# Altium PCB T1_MODIFYV1_0527.PCBDOC (part 3 of 6)
Units mm, origin at the board's own origin, x right, y up, seen from the top; angles counter-clockwise.
Board outline 1320.8 x 844.04 mm, 2 copper layers (Top Layer, Bottom Layer); 219 components, 215 nets, 1393 pads, 492 vias.
Unrouted connection lines stored in the file: 60.
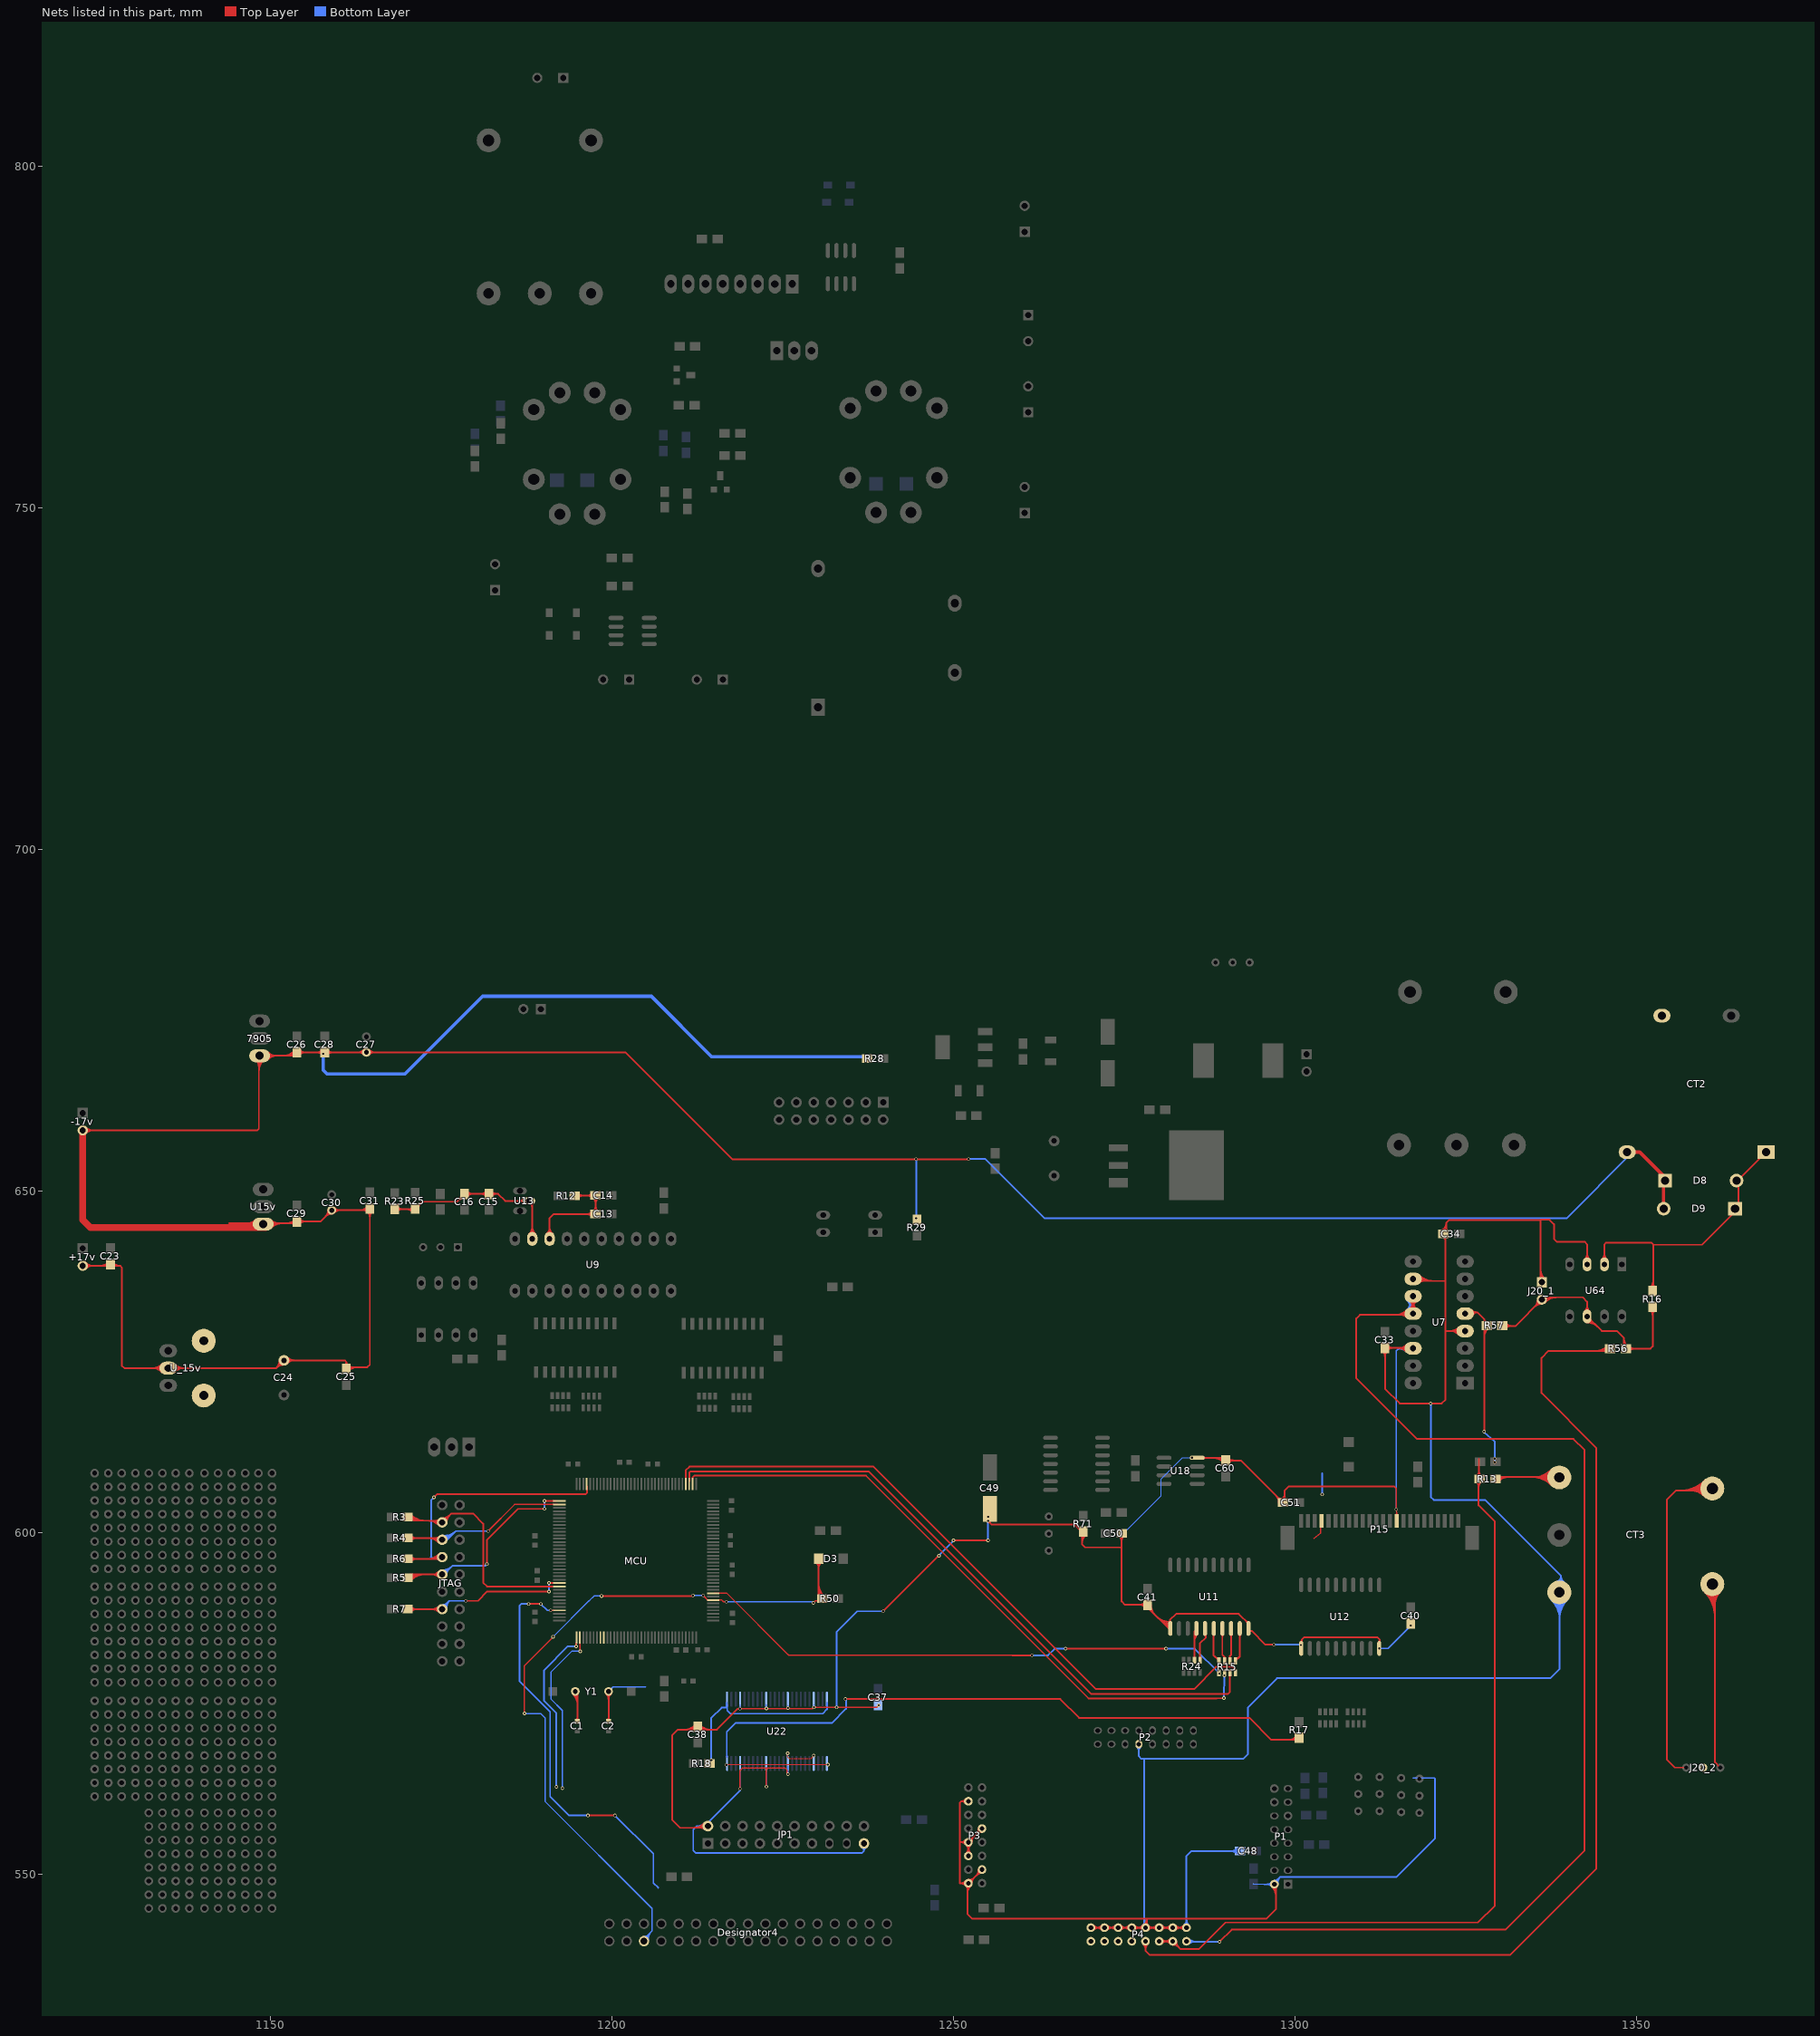
[diagram p3: the nets of this part, all layers, seen from the top]

## Via types
v1: diameter 0.5, hole 0.3, Top Layer to Bottom Layer, 470 vias
v2: diameter 0.8, hole 0.5, Top Layer to Bottom Layer, 12 vias
v3: diameter 3, hole 1.5, Top Layer to Bottom Layer, 4 vias
v4: diameter 3, hole 3, Top Layer to Bottom Layer, 4 vias
v5: diameter 1, hole 0.7, Top Layer to Bottom Layer, 2 vias

## Nets (pads, with @x,y where several pads share a name; then routed paths per layer and width w, separated by ;. In a path a pad name is that pad's centre, name@x,y a point inside that pad or via, vN(x,y) a via of type N, cw(c..) or ccw(c..) an arc to the next point about the centre after c; other vN are vias at no path point) (continued)
GND_D1: 7905.1 +17v.2 -17v.2 C23.2 C24.2 C25.2 C26.1 C27.1 C28.1 C29.2 C30.1 C31.2 C33.1 C34.1 C37.1 C38.2 C40.1 C41.1 C48.1 C49.1 C50.1 C51.2 C60.1 CT2.2 CT3.1 D8.2 D9.1 J20_1.1 JP1.2 JP1.19 P1.2 P2.26 P3.35 P3.40 P3.41 P3.43 P3.46 P3.47 P4.50 P4.52 P4.54 P4.56 P4.58 P4.60 P4.62 P4.64 P15.15 R28.2 R29.1 R71.2 U7.4 U7.10 U7.14 U11.1 U11.10 U12.1 U12.10 U15v.1 U18.4 U22.4 U22.10 U22.15 U22.21 U22.28 U22.34 U22.39 U22.45 U64.3 U_15v.2 | length 1491.3
  Top Layer w0.15: v1(1225.677,567.741) 1225.677,567.233 1225.931,566.979 1229.081,566.979 v1(1229.512,567.411) ; P15.15@1314.706,602.619 ccw(c1314.403,602.922) 1314.831,602.922 ; v1@1314.745,603.418 cw(c1314.537,603.21) v1@1314.831,603.21 ; v1(1314.78,603.453) 1314.831,603.402 P15.15@1314.831,602.463 ; 1314.831,603.085 ccw(c1315.49,603.085) P15.15@1315.024,602.619
  Top Layer w0.2: v1(1218.692,562.534) 1218.692,565.201 1219.06,565.569 ; v1(1218.692,574.269) 1229.335,574.269 v1(1229.538,574.472) 1238.707,574.472 v1(1239.012,574.777) ; 1219.048,565.582 1225.296,565.582 1225.601,565.277 1225.601,564.672 v1@1225.652,564.621 ; v1(1222.553,562.889) 1222.553,565.531 1222.527,565.556 1222.807,565.556
  Top Layer w0.254: +17v.2@1122.477,639.115 C23.2@1126.287,639.115 ; -17v.2@1122.477,658.927 1148.004,658.927 1148.258,659.181 1148.258,669.849 1153.338,669.849 C26.1@1153.846,670.357 1201.928,670.357 1217.574,654.71 v1@1252.169,654.71 ; +17v.2@1122.738,638.854 cw(c1123.368,638.224) 1123.368,639.115 cw(c1123.368,640.006) +17v.2@1122.738,639.376 ; -17v.2@1122.738,658.666 cw(c1123.368,658.036) 1123.368,658.927 cw(c1123.368,659.818) -17v.2@1122.738,659.188 ; +17v.2@1122.917,638.674 cw(c1123.981,637.611) 1123.981,639.115 cw(c1123.981,640.619) +17v.2@1122.917,639.555 ; -17v.2@1122.917,658.486 cw(c1123.981,657.423) 1123.981,658.927 cw(c1123.981,660.431) -17v.2@1122.917,659.367 ; 1125.008,639.115 ccw(c1125.008,640.775) C23.2@1126.182,639.601 ; C23.2@1126.182,638.883 ccw(c1125.621,638.322) 1125.621,639.115 ccw(c1125.621,640.162) C23.2@1126.361,639.421 ; C23.2@1126.541,639.369 1126.795,639.115 1127.938,639.115 ; C23.2@1126.732,639.409 ccw(c1127.379,639.973) 1127.379,639.115 ; C23.2@1126.9,638.883 cw(c1127.461,638.322) 1127.461,639.115 ; C23.2@1126.924,639.576 ccw(c1127.938,640.461) 1127.938,639.115 ; U_15v.2@1134.059,623.545 ccw(c1132.649,622.136) 1132.649,624.129 ccw(c1132.649,626.122) U_15v.2@1134.059,624.713 ; U_15v.2@1134.238,623.725 ccw(c1133.263,622.749) 1133.263,624.129 ccw(c1133.263,625.509) U_15v.2@1134.238,624.533 ; U_15v.2@1135.741,623.725 cw(c1136.717,622.749) 1136.717,624.129 cw(c1136.717,625.509) U_15v.2@1135.741,624.533 ; U_15v.2@1135.921,623.545 cw(c1137.33,622.136) 1137.33,624.129 cw(c1137.33,626.122) U_15v.2@1135.921,624.713 ; 1140.19,644.636 1140.257,644.703 ; 1143.94,645.338 1153.592,645.338 C29.2@1153.846,645.592 1157.275,645.592 C30.1@1158.926,647.243 1164.26,647.243 C31.2@1164.514,647.497 1164.514,624.637 1164.133,624.256 1161.339,624.256 C25.2@1161.085,624.002 1161.085,625.018 ; 1146.022,645.338 cw(c1146.022,642.911) U15v.1@1147.738,644.627 ; U15v.1@1147.738,645.795 cw(c1146.635,646.897) 1146.635,645.338 cw(c1146.635,643.524) U15v.1@1147.917,644.807 ; 7905.1@1147.801,669.265 cw(c1146.698,668.162) 1148.258,668.162 cw(c1150.071,668.162) 7905.1@1148.789,669.445 ; U15v.1@1147.917,645.615 cw(c1147.248,646.284) 1147.248,645.338 cw(c1147.248,644.138) U15v.1@1148.097,644.986 ; 7905.1@1147.981,669.445 cw(c1147.312,668.776) 1148.258,668.776 cw(c1149.458,668.776) 7905.1@1148.609,669.624 ; 1148.258,667.549 cw(c1150.684,667.549) 7905.1@1148.969,669.265 ; 7905.1@1149.36,669.445 cw(c1150.336,668.469) 1150.336,669.849 cw(c1150.336,671.229) 7905.1@1149.36,670.253 ; 7905.1@1149.54,669.265 cw(c1150.949,667.856) 1150.949,669.849 cw(c1150.949,671.842) 7905.1@1149.54,670.433 ; U15v.1@1149.689,644.986 cw(c1150.537,644.138) 1150.537,645.338 cw(c1150.537,646.284) U15v.1@1149.868,645.615 ; U15v.1@1149.868,644.807 cw(c1151.151,643.524) 1151.151,645.338 cw(c1151.151,646.897) U15v.1@1150.048,645.795 ; U15v.1@1150.048,644.627 cw(c1151.764,642.911) 1151.764,645.338 ; C24.2@1151.28,625.272 cw(c1149.686,625.272) 1150.813,624.144 cw(c1151.941,623.017) C24.2@1151.941,624.611 ; C24.2@1151.534,625.272 cw(c1150.553,625.272) 1151.247,624.578 cw(c1151.941,623.884) C24.2@1151.941,624.865 ; 1151.7,669.849 ccw(c1151.7,672.376) C26.1@1153.487,670.589 ; C24.2@1152.228,624.984 cw(c1152.922,624.291) 1152.922,625.272 cw(c1152.922,626.253) C24.2@1152.228,625.559 ; 1152.313,645.338 ccw(c1152.313,646.998) C29.2@1153.487,645.824 ; 1152.313,669.849 ccw(c1152.313,671.763) C26.1@1153.666,670.409 ; C24.2@1152.408,624.805 cw(c1153.535,623.677) 1153.535,625.272 cw(c1153.535,626.866) C24.2@1152.408,625.739 ; 1152.926,669.849 ccw(c1152.926,671.15) C26.1@1153.846,670.23 ; C29.2@1153.487,645.106 ccw(c1152.926,644.545) 1152.926,645.338 ccw(c1152.926,646.385) C29.2@1153.666,645.644 ; C29.2@1154.205,645.233 cw(c1155.072,644.365) 1155.072,645.592 cw(c1155.072,646.818) C29.2@1154.205,645.951 ; C26.1@1154.205,669.998 cw(c1155.072,669.13) 1155.072,670.357 cw(c1155.072,671.583) C26.1@1154.205,670.716 ; 1157.195,670.357 cw(c1157.195,669.668) C28.1@1157.683,670.155 ; C28.1@1157.551,669.998 ccw(c1156.683,669.13) 1156.683,670.357 ccw(c1156.683,671.583) C28.1@1157.551,670.716 ; C28.1@1157.68,670.155 cw(c1158.167,669.668) C28.1@1158.167,670.357 ; C28.1@1158.269,669.998 cw(c1159.136,669.13) 1159.136,670.357 cw(c1159.136,671.583) C28.1@1158.269,670.716 ; C30.1@1158.403,647.243 cw(c1157.14,647.243) 1158.033,646.35 cw(c1158.926,645.457) C30.1@1158.926,646.72 ; C30.1@1159.296,646.873 cw(c1160.188,645.98) 1160.188,647.243 cw(c1160.188,648.505) C30.1@1159.296,647.613 ; C25.2@1160.827,624.566 ccw(c1160.561,625.018) 1161.085,625.018 ; C25.2@1161.264,623.949 cw(c1162.005,623.209) 1162.005,624.256 cw(c1162.005,625.049) C25.2@1161.444,624.488 ; C25.2@1161.343,624.566 cw(c1161.609,625.018) 1161.085,625.018 ; C25.2@1161.444,623.77 cw(c1162.618,622.596) 1162.618,624.256 ; 1162.981,647.243 ccw(c1162.981,648.903) C31.2@1164.155,647.729 ; C27.1@1163.636,669.987 ccw(c1162.743,669.094) 1162.743,670.357 ccw(c1162.743,671.619) C27.1@1163.636,670.727 ; C31.2@1164.334,647.549 cw(c1163.594,648.29) 1163.594,647.243 cw(c1163.594,646.45) 1164.155,647.011 cw(c1163.287,646.143) 1164.514,646.143 cw(c1165.74,646.143) C31.2@1164.873,647.011 ; C27.1@1164.376,669.987 cw(c1165.268,669.094) 1165.268,670.357 cw(c1165.268,671.619) C27.1@1164.376,670.727 ; 1210.532,571.221 ccw(c1210.532,573.488) C38.2@1212.135,571.885 ; 1211.145,571.221 ccw(c1211.145,572.874) C38.2@1212.315,571.705 ; 1211.759,571.221 ccw(c1211.759,572.261) 1212.494,571.525 ccw(c1213.23,572.261) 1213.23,571.221 ; 1211.805,556.844 ccw(c1211.805,559.285) JP1.2@1213.531,557.559 ; 1212.418,556.844 ccw(c1212.418,558.671) JP1.2@1213.71,557.379 ; C38.2@1212.674,571.705 ccw(c1213.843,572.874) 1213.843,571.221 ; C38.2@1212.854,571.885 ccw(c1214.457,573.488) 1214.457,571.221 ; 1213.002,556.844 cw(c1213.002,556.096) JP1.2@1213.531,556.625 ; 1213.032,556.844 ccw(c1213.032,558.058) JP1.2@1213.89,557.2 ; JP1.2@1213.998,556.844 1209.929,556.844 1208.761,558.013 1208.761,570.382 1209.599,571.221 1215.339,571.221 1218.387,574.269 v1(1218.692,574.269) ; v1(1239.647,588.543) 1239.68,588.627 v1(1247.828,596.675) ; v1(1249.959,598.907) v1(1255.014,598.907) ; 1250.861,554.729 P3.41@1252.134,554.729 ; P3.35@1251.734,560.417 ccw(c1251.095,559.919) 1251.095,560.729 ; P3.35@1251.734,561.041 cw(c1251.095,561.538) 1251.095,560.729 ; P3.47@1251.775,549.088 cw(c1250.908,549.955) 1250.908,548.729 ; P3.43@1251.775,553.088 ccw(c1250.908,553.955) 1252.134,553.955 ccw(c1253.361,553.955) P3.43@1252.494,553.088 ; P3.41@1251.775,555.088 cw(c1250.908,555.955) 1250.908,554.729 cw(c1250.908,553.502) 1251.775,554.37 cw(c1250.908,553.502) 1252.134,553.502 cw(c1253.361,553.502) P3.41@1252.494,554.37 ; 1251.991,547.157 cw(c1253.706,547.157) P3.47@1252.494,548.37 ; 1251.991,547.77 cw(c1253.093,547.77) P3.47@1252.314,548.549 ; 1251.991,547.848 ccw(c1251.253,547.848) 1251.775,548.37 ccw(c1250.908,547.502) 1250.908,548.729 ; P3.47@1251.991,548.729 1251.991,544.22 1252.677,543.535 1295.761,543.535 1297.178,544.952 P1.2@1297.178,548.615 ; P3.47@1252.134,548.983 ccw(c1252.134,549.696) 1252.639,549.192 ; P3.47@1252.134,549.237 ccw(c1252.134,550.563) 1253.072,549.625 ; P3.43@1252.134,552.729 P3.41@1252.134,554.729 ; P3.41@1252.134,555.237 ccw(c1252.134,556.463) 1253.002,555.596 ccw(c1253.869,554.729) P3.41@1252.642,554.729 ; P3.35@1252.134,560.729 1251.095,560.729 ; P3.47@1252.642,548.729 cw(c1253.769,548.729) 1252.972,549.525 ; 1253.238,549.791 ccw(c1252.3,550.729) P3.46@1253.626,550.729 ; 1253.338,549.891 cw(c1254.134,549.094) P3.46@1254.134,550.221 ; P3.40@1253.626,556.729 cw(c1252.4,556.729) 1253.267,555.862 cw(c1254.134,554.994) P3.40@1254.134,556.221 ; 1253.672,550.225 ccw(c1253.167,550.729) P3.46@1253.88,550.729 ; P3.40@1253.973,556.729 P3.40@1254.134,556.729 P3.41@1252.134,554.729 ; P3.46@1254.344,550.897 1252.176,548.729 1250.908,548.729 ; C49.1@1255.015,601.775 ccw(c1254.528,602.263) C49.1@1255.217,602.263 ; C49.1@1255.015,601.779 cw(c1254.909,601.489) 1255.217,601.489 ; C49.1@1255.015,602.36 ccw(c1254.528,602.847) C49.1@1255.217,602.847 ; C49.1@1255.015,602.362 cw(c1254.528,601.875) C49.1@1255.217,601.875 ; C49.1@1255.073,601.752 cw(c1255.033,601.572) 1255.217,601.572 cw(c1255.382,601.572) C49.1@1255.364,601.736 ; C49.1@1255.217,603.225 1255.217,601.574 1255.573,601.218 1267.714,601.218 R71.2@1268.933,599.999 ; 1267.905,601.027 ccw(c1268.539,601.662) R71.2@1268.823,600.811 ; 1268.195,600.737 ccw(c1268.684,601.226) R71.2@1268.904,600.57 ; R71.2@1268.386,600.546 cw(c1268.169,600.329) R71.2@1268.476,600.329 ; R71.2@1268.625,599.716 cw(c1268.312,599.403) 1268.754,599.403 ; 1268.754,598.332 cw(c1270.675,598.332) R71.2@1269.338,599.71 ; 1268.754,598.932 cw(c1270.093,598.932) R71.2@1269.161,599.893 ; R71.2@1268.754,600.178 1268.754,598.347 1269.213,597.888 1274.397,597.888 1274.572,597.713 ; P4.50@1270.067,542.229 P4.64@1284.067,542.229 ; P4.50@1270.426,541.87 cw(c1271.293,541.003) 1271.293,542.229 cw(c1271.293,543.455) P4.50@1270.426,542.588 ; P4.52@1271.707,541.87 ccw(c1270.84,541.003) 1270.84,542.229 ccw(c1270.84,543.455) P4.52@1271.707,542.588 ; P4.52@1272.426,541.87 cw(c1273.293,541.003) 1273.293,542.229 cw(c1273.293,543.455) P4.52@1272.426,542.588 ; P4.54@1273.707,541.87 ccw(c1272.84,541.003) 1272.84,542.229 ccw(c1272.84,543.455) P4.54@1273.707,542.588 ; C50.1@1274.213,599.589 cw(c1273.346,598.722) 1274.572,598.722 cw(c1275.798,598.722) C50.1@1274.931,599.589 ; P4.54@1274.426,541.87 cw(c1275.293,541.003) 1275.293,542.229 cw(c1275.293,543.455) P4.54@1274.426,542.588 ; C50.1@1274.572,599.948 1274.572,589.966 1275.055,589.483 C41.1@1278.382,589.483 ; P4.56@1275.707,541.87 ccw(c1274.84,541.003) 1274.84,542.229 ccw(c1274.84,543.455) P4.56@1275.707,542.588 ; P4.56@1276.426,541.87 cw(c1277.293,541.003) 1277.293,542.229 cw(c1277.293,543.455) P4.56@1276.426,542.588 ; P4.58@1277.707,541.87 ccw(c1276.84,541.003) 1276.84,542.229 ccw(c1276.84,543.455) P4.58@1277.707,542.588 ; P4.58@1277.791,542.656 ccw(c1277.238,543.509) 1278.255,543.509 P4.58@1278.255,542.229 ; P4.58@1277.929,542.442 ccw(c1277.54,543.042) 1278.255,543.042 ; C41.1@1278.023,589.124 ccw(c1277.156,588.257) 1277.156,589.483 ccw(c1277.156,590.71) C41.1@1278.023,589.842 ; 1278.255,543.001 ccw(c1278.838,543.001) 1278.426,542.588 ccw(c1279.293,543.455) 1279.293,542.229 ccw(c1279.293,541.003) P4.58@1278.426,541.87 ; C41.1@1278.382,588.848 cw(c1278.382,588.235) 1278.816,588.669 ; C41.1@1278.636,589.356 ccw(c1279.862,589.356) 1278.995,588.489 ; C41.1@1278.661,589.636 1278.661,588.823 U11.1@1281.457,586.027 ; C41.1@1278.89,589.356 ccw(c1280.73,589.356) 1279.429,588.055 ; 1279.661,587.824 ccw(c1281.709,589.873) U11.1@1281.709,586.975 ; P4.60@1279.707,541.87 ccw(c1278.84,541.003) 1278.84,542.229 ccw(c1278.84,543.455) P4.60@1279.707,542.588 ; 1280.094,587.39 ccw(c1281.709,589.005) U11.1@1281.709,586.721 ; P4.60@1280.426,541.87 cw(c1281.293,541.003) 1281.293,542.229 cw(c1281.293,543.455) P4.60@1280.426,542.588 ; 1280.528,586.956 ccw(c1281.709,588.138) U11.1@1281.709,586.467 ; 1280.961,586.523 ccw(c1281.709,587.271) U11.1@1281.709,586.213 ; 1281.395,586.089 ccw(c1281.709,586.404) U11.1@1281.709,585.959 ; U11.1@1281.633,586.41 1281.633,587.248 ; P4.62@1281.707,541.87 ccw(c1280.84,541.003) 1280.84,542.229 ccw(c1280.84,543.455) P4.62@1281.707,542.588 ; U11.1@1281.8,586.949 cw(c1281.984,587.248) 1281.633,587.248 ; P4.62@1282.426,541.87 cw(c1283.293,541.003) 1283.293,542.229 cw(c1283.293,543.455) P4.62@1282.426,542.588 ; P4.64@1283.707,541.87 ccw(c1282.84,541.003) 1282.84,542.229 ccw(c1282.84,543.455) P4.64@1283.707,542.588 ; U18.4@1285.633,610.997 1289.787,610.997 C60.1@1290.041,610.743 ; U18.4@1286.555,610.875 cw(c1286.851,610.579) 1286.851,610.997 cw(c1286.851,611.415) U18.4@1286.555,611.119 ; 1287.972,610.997 cw(c1287.972,608.903) C60.1@1289.453,610.384 ; 1288.586,610.997 cw(c1288.586,609.517) C60.1@1289.632,610.563 ; C60.1@1289.453,611.102 cw(c1289.199,611.356) 1289.199,610.997 cw(c1289.199,610.13) C60.1@1289.812,610.743 ; C60.1@1289.812,610.616 1292.022,610.616 1298.194,604.444 C51.2@1298.219,604.444 ; C60.1@1290.171,610.257 cw(c1291.038,609.39) 1291.038,610.616 cw(c1291.038,611.842) C60.1@1290.171,610.975 ; 1292.738,587.141 ccw(c1293.139,587.542) U11.10@1293.139,586.975 ; 1292.888,586.992 cw(c1292.698,586.802) U11.10@1292.966,586.802 ; U11.10@1293.165,585.673 1293.597,585.673 1295.629,583.641 v1(1296.873,583.641) ; U11.10@1293.216,586.664 1291.717,588.162 1282.548,588.162 1281.633,587.248 ; P1.2@1296.571,548.23 cw(c1295.107,546.766) 1297.178,546.766 ; P1.2@1296.751,548.41 cw(c1295.72,547.379) 1297.178,547.379 ; P1.2@1296.931,548.589 cw(c1296.333,547.992) 1297.178,547.992 ; 1297.153,605.484 cw(c1296.113,604.444) C51.2@1297.584,604.444 ; 1297.178,547.96 cw(c1297.56,547.96) P1.2@1297.29,548.23 ; 1297.399,605.239 ccw(c1298.092,605.933) C51.2@1298.092,604.952 ; C51.2@1297.587,605.051 cw(c1296.98,604.444) C51.2@1297.838,604.444 ; C51.2@1297.987,604.803 ccw(c1296.875,605.916) 1298.448,605.916 ; C51.2@1298.167,604.623 ccw(c1297.488,605.302) 1298.448,605.302 ; C51.2@1298.448,604.647 1298.448,606.222 1299.058,606.831 1314.475,606.831 1314.78,606.527 v1(1314.78,603.453) ; 1298.448,605.425 ccw(c1299.328,605.425) C51.2@1298.706,604.803 ; U12.1@1300.758,584.02 ccw(c1300.491,584.378) 1300.937,584.378 ; U12.1@1300.937,583.997 1300.937,584.378 ; U12.10@1312.172,584.006 ccw(c1311.794,584.403) 1312.342,584.403 ; U12.10@1312.342,583.565 1312.342,584.403 ; C33.1@1312.77,626.614 cw(c1311.903,625.747) 1313.129,625.747 cw(c1314.356,625.747) C33.1@1313.488,626.614 ; C33.1@1313.078,627.075 1317.193,627.075 U7.14@1317.244,627.024 ; C33.1@1313.129,627.101 1313.129,621.106 1315.288,618.947 1321.435,618.947 1321.994,619.506 C34.1@1321.994,643.611 ; C33.1@1313.309,627.28 ccw(c1313.804,627.775) 1313.804,627.075 ; C33.1@1313.488,626.741 cw(c1314.294,625.935) 1314.294,627.075 ; C33.1@1313.488,627.46 ccw(c1314.417,628.388) 1314.417,627.075 ; 1314.865,627.075 cw(c1314.865,625.001) U7.14@1316.332,626.468 ; 1315.11,627.075 ccw(c1315.11,628.803) U7.14@1316.332,627.581 ; 1315.478,627.075 cw(c1315.478,625.614) U7.14@1316.511,626.647 ; 1315.723,627.075 ccw(c1315.723,628.19) U7.14@1316.511,627.402 ; U7.10@1317.269,636.88 1321.968,636.88 ; U7.10@1317.797,637.382 ccw(c1319.01,638.595) 1319.01,636.88 ; U7.10@1317.977,637.562 ccw(c1319.623,639.208) 1319.623,636.88 ; U7.10@1318.156,636.628 cw(c1318.765,636.019) 1318.765,636.88 ; U7.10@1318.156,637.741 ccw(c1320.236,639.821) 1320.236,636.88 ; C34.1@1321.508,643.607 cw(c1320.334,642.433) 1321.994,642.433 ; C34.1@1321.58,644.385 ccw(c1320.91,645.363) 1322.095,645.363 ; C34.1@1321.687,643.787 cw(c1320.947,643.046) 1321.994,643.046 cw(c1322.787,643.046) C34.1@1322.226,643.607 ; C34.1@1321.723,644.176 ccw(c1321.24,644.881) 1322.095,644.881 ; 1321.994,629.615 1322.045,629.564 U7.4@1324.864,629.564 ; C34.1@1322.095,643.787 1322.095,645.363 ; 1322.095,644.641 ccw(c1322.541,644.641) C34.1@1322.226,644.325 ; U7.4@1323.952,629.008 ccw(c1322.607,627.663) 1322.607,629.564 ccw(c1322.607,631.465) U7.4@1323.952,630.121 ; U7.4@1324.131,629.187 ccw(c1323.221,628.277) 1323.221,629.564 ccw(c1323.221,630.852) U7.4@1324.131,629.942 ; J20_1.1@1335.65,637.142 ccw(c1335.077,637.715) 1335.888,637.715 ; 1335.888,637.47 ccw(c1336.859,637.47) J20_1.1@1336.172,636.783 ; 1335.888,638.083 ccw(c1337.472,638.083) J20_1.1@1336.352,636.963 ; 1335.888,638.696 ccw(c1338.085,638.696) J20_1.1@1336.531,637.142 ; 1335.888,645.846 1337.208,645.846 1337.871,645.183 1337.871,643.024 1338.275,642.62 1342.339,642.62 1342.72,642.239 U64.3@1342.72,639.318 ; J20_1.1@1336.091,636.702 1335.888,636.905 1335.888,645.82 1322.553,645.82 1322.095,645.363 ; U64.3@1342.361,640.058 ccw(c1341.494,640.925) 1342.72,640.925 ccw(c1343.947,640.925) U64.3@1343.079,640.058 ; 1127.938,639.115 1128.192,638.861 1128.192,624.51 1128.573,624.129 1130.224,624.129 1150.798,624.129 C24.2@1151.941,625.272 1160.831,625.272 1161.085,625.018 ; 1250.908,548.729 1250.861,548.843 1250.861,560.495 1251.095,560.729 ; 1300.937,584.378 1301.293,584.733 1312.012,584.733 1312.342,584.403
  Top Layer w0.5: CT2.2@1348.588,655.739 1350.404,655.739 1354.127,652.016 D8.2@1354.127,651.586 ; D8.2@1353.896,652.247 1353.896,647.294 D9.1@1354.074,647.116
  Top Layer w1: -17v.2@1122.477,658.927 1122.477,645.846 1123.62,644.703 U15v.1@1149.274,644.703 ; 1146.002,644.703 ccw(c1146.002,647.53) U15v.1@1148.001,645.531
  Bottom Layer w0.15: v1@1218.743,574.319 U22.28@1218.743,574.904 ; U22.10@1225.677,567.08 v1(1225.677,567.741) ; v1(1229.538,574.472) U22.45@1229.538,574.904 ; v1(1274.597,600.1) 1275.004,600.1 1280.363,605.46 1280.363,607.924 1283.462,611.022 1285.24,611.022
  Bottom Layer w0.2: U22.21@1218.667,565.353 1218.667,562.331 1218.717,562.28 ; v1(1222.553,562.889) U22.15@1222.553,565.404 ; v1(1222.553,574.319) U22.34@1222.553,574.904 ; U22.39@1225.702,574.726 1225.702,574.421 v1(1225.728,574.396) ; v1(1225.728,564.693) U22.10@1225.728,565.836
  Bottom Layer w0.254: JP1.2@1213.531,556.625 ccw(c1212.403,555.498) 1212.403,557.092 ccw(c1212.403,558.686) JP1.2@1213.531,557.559 ; JP1.2@1213.71,556.805 ccw(c1213.017,556.111) 1213.017,557.092 ccw(c1213.017,558.073) JP1.2@1213.71,557.379 ; JP1.2@1213.993,557.378 1213.993,557.555 1218.717,562.28 ; JP1.2@1213.998,557.092 1212.361,557.092 1211.859,556.59 1211.859,553.517 1212.24,553.136 1236.548,553.136 1236.858,553.445 ; v1(1232.84,574.472) 1232.84,585.495 1235.888,588.543 v1(1239.647,588.543) ; JP1.19@1236.544,553.971 cw(c1236.261,553.445) 1236.858,553.445 ; JP1.19@1236.858,554.552 1236.858,553.445 ; JP1.19@1237.171,553.971 ccw(c1237.455,553.445) 1236.858,553.445 ; v1(1244.498,646.074) v1(1244.498,654.71) ; v1(1247.828,596.675) v1(1249.959,598.907) ; v1(1252.169,654.736) 1254.608,654.736 1263.294,646.049 1339.698,646.049 CT2.2@1349.146,655.498 ; v1(1255.014,598.907) v1(1255.014,602.361) ; P2.26@1276.819,568.679 cw(c1276.182,568.043) 1277.082,568.043 cw(c1277.983,568.043) P2.26@1277.346,568.679 ; P2.26@1277.082,569.078 1277.082,567.339 1277.468,566.953 1292.377,566.953 1293.063,567.639 1293.063,574.472 1297.33,578.739 1337.31,578.739 1338.707,580.136 CT3.1@1338.707,591.134 ; P4.58@1277.707,542.588 ccw(c1277.305,542.99) 1277.874,542.99 ; 1277.874,543.307 ccw(c1279.145,543.307) P4.58@1278.246,542.409 ; 1277.874,543.921 ccw(c1279.758,543.921) P4.58@1278.426,542.588 ; 1277.874,566.953 1277.874,542.422 P4.58@1278.067,542.229 ; P4.64@1283.707,542.588 ccw(c1282.84,543.455) 1284.067,543.455 ccw(c1285.293,543.455) P4.64@1284.426,542.588 ; P4.64@1284.067,542.229 1284.067,552.699 1284.808,553.441 C48.1@1291.92,553.441 ; C48.1@1291.434,553.081 ccw(c1290.567,552.214) 1290.567,553.441 ccw(c1290.567,554.667) C48.1@1291.434,553.8 ; 1293.876,548.615 P1.2@1296.929,548.538 ; P1.2@1296.509,548.873 cw(c1295.928,549.264) 1295.911,548.564 cw(c1295.89,547.709) P1.2@1296.543,548.261 ; v1(1296.873,583.641) 1300.785,583.641 v1(1300.836,583.59) ; P1.2@1296.931,548.589 1296.931,548.799 1297.762,549.631 ; P1.2@1296.931,549.097 ccw(c1296.931,549.817) 1297.44,549.308 ; P1.2@1297.182,548.623 cw(c1297.942,548.726) 1297.4,549.268 ; P1.2@1297.434,548.657 cw(c1298.58,548.813) 1297.762,549.631 ; v1@1300.718,583.641 cw(c1300.718,583.473) v1@1300.837,583.592 ; v1(1312.291,583.106) 1313.585,583.106 v1(1316.914,586.435) ; v1(1314.78,603.453) 1314.78,626.643 1315.085,626.948 ; 1315.171,626.948 cw(c1315.171,625.307) U7.14@1316.332,626.468 ; 1315.615,626.948 ccw(c1315.615,628.049) U7.14@1316.473,627.359 ; 1315.785,626.948 cw(c1315.785,625.921) U7.14@1316.511,626.647 ; U7.14@1316.275,627.518 cw(c1315.085,628.475) 1315.085,626.948 ; U7.14@1317.244,626.948 1315.085,626.948 ; 1317.269,564.134 1320.343,564.134 1320.47,564.007 1320.47,555.295 1314.806,549.631 1297.762,549.631 ; U7.14@1317.269,627.126 U7.14@1317.447,626.948 ; v1(1319.835,618.947) 1319.835,605.257 1320.267,604.825 1327.785,604.825 1338.91,593.7 ; CT3.1@1337.509,590.164 cw(c1334.615,587.271) 1338.707,587.271 ; CT3.1@1337.64,591.134 CT3.1@1338.986,591.134 ; CT3.1@1337.688,590.344 cw(c1335.229,587.884) 1338.707,587.884 ; CT3.1@1337.868,590.524 cw(c1335.842,588.498) 1338.707,588.498 ; CT3.1@1338.047,590.703 cw(c1336.455,589.111) 1338.707,589.111 ; CT3.1@1338.273,592.889 ccw(c1338.076,593.7) 1338.91,593.7 ; CT3.1@1338.333,592.642 ccw(c1338.155,593.376) 1338.91,593.376 ; CT3.1@1338.393,592.395 ccw(c1338.233,593.053) 1338.91,593.053 ; 1338.707,587.516 cw(c1342.452,587.516) CT3.1@1339.804,590.164 ; 1338.707,588.13 cw(c1341.839,588.13) CT3.1@1339.624,590.344 ; 1338.707,588.743 cw(c1341.225,588.743) CT3.1@1339.445,590.524 ; 1338.707,589.356 cw(c1340.612,589.356) CT3.1@1339.265,590.703 ; CT3.1@1338.91,591.642 1338.91,593.7 ; 1338.91,593.257 ccw(c1339.794,593.257) CT3.1@1339.348,592.494 ; CT3.1@1339.476,592.713 cw(c1340.054,593.7) 1338.91,593.7
  Bottom Layer w0.5: v1(1157.681,670.154) 1157.681,667.741 1158.24,667.182 1169.645,667.182 1181.024,678.561 1205.713,678.561 1214.577,669.696 v1(1237.31,669.696)
  other v1: 1255.014,601.777 1284.859,611.022
GPB13: MCU.74 R15.2 | length 95.1
  Top Layer w0.2: 1237.158,608.381 1269.746,575.793
  Top Layer w0.254: MCU.74@1211.732,607.847 1211.732,608.101 1212.012,608.381 1237.158,608.381 ; 1269.746,575.793 1288.466,575.793 v1(1289.558,575.843)
  Bottom Layer w0.254: v1(1289.558,575.843) v1(1289.609,579.171) v1@1289.583,579.196
GPB14: MCU.75 R15.3 | length 97
  Top Layer w0.254: MCU.75@1211.275,607.619 1211.275,608.813 1211.478,609.016 1237.539,609.016 1270.127,576.428 1290.142,576.428 1290.422,576.707 R15.3@1290.422,579.222 ; R15.3@1290.347,579.164 cw(c1290.168,578.985) 1290.422,578.985 ; 1290.422,578.923 cw(c1290.762,578.923) R15.3@1290.521,579.164
GPB15: MCU.76 R15.4 | length 98.8
  Top Layer w0.254: MCU.76@1210.742,607.746 1210.742,609.168 1211.301,609.727 1238.225,609.727 1270.787,577.164 1285.189,577.164 1288.415,580.39 1290.853,580.39 1291.133,580.111 ; 1291.004,580.24 cw(c1290.683,579.919) R15.4@1291.117,579.787 ; R15.4@1291.133,579.12 1291.133,580.111 ; R15.4@1291.288,579.862 cw(c1291.41,580.111) 1291.133,580.111
GPC5: MCU.45 R15.1 | length 79.5
  Top Layer w0.2: MCU.45@1214.984,591.16 1216.787,591.16 1225.833,582.114
  Top Layer w0.254: 1225.833,582.114 1258.593,582.067 v1(1261.466,582.092) ; v1(1266.368,583.057) v1(1281.074,583.057)
  Bottom Layer w0.254: v1(1261.466,582.092) 1263.802,582.092 1264.768,583.057 v1(1266.368,583.057) ; v1@1281.125,583.057 1285.291,583.057 v1(1288.923,579.425)
GPE0: MCU.141 | length 59
  Top Layer w0.254: v1(1187.755,589.61) v1(1189.533,589.61) ; 1191.242,588.67 MCU.141@1191.565,588.67 ; v1(1196.442,558.648) v1(1200.379,558.648)
  Bottom Layer w0.254: v1(1187.755,589.61) 1186.663,589.61 1186.434,589.382 1186.434,578.282 1190.904,573.811 1190.904,561.442 1193.698,558.648 v1(1196.442,558.648) ; v1(1189.533,589.61) 1190.473,588.67 v1(1190.981,588.67) ; v1(1200.379,558.648) 1200.404,558.648 1206.017,553.034 1206.017,548.767 1206.728,548.056
GPE2: MCU.1 | length 24.4
  Top Layer w0.254: v1@1194.74,583.438 MCU.1@1194.74,583.895
  Bottom Layer w0.254: v1(1191.819,562.839) 1191.819,573.615 1190.015,575.419 1190.015,579.907 1193.521,583.413 v1(1194.714,583.413)
GPE3: MCU.2 | length 24.5
  Top Layer w0.2: MCU.2@1195.248,583.895 1195.248,583.946 1195.284,583.91 v1@1195.284,582.727
  Bottom Layer w0.2: v1(1192.682,562.635) 1192.682,574.015 1191.006,575.691 1191.006,579.603 1194.13,582.727 v1@1195.299,582.727
  other v1: 1195.299,582.676
IN_BIAO: P4.49
IN_CHA: P4.63 U7.11 U7.12 | length 211.1
  Top Layer w0.254: v1(1288.909,540.167) 1290.676,541.934 1330.782,541.934 1342.314,553.466 1342.314,612.191 1340.739,613.766 1317.803,613.766 1308.913,622.656 1308.913,631.393 1309.446,631.927 U7.12@1317.117,631.927 ; 1314.558,631.927 ccw(c1314.558,634.435) U7.12@1316.332,632.661 ; 1315.171,631.927 ccw(c1315.171,633.821) U7.12@1316.511,632.482 ; 1315.417,631.927 cw(c1315.417,630.633) U7.12@1316.332,631.548 ; 1315.785,631.927 ccw(c1315.785,633.208) U7.12@1316.691,632.302 ; U7.12@1316.687,632.661 ccw(c1315.343,634.005) 1317.244,634.005 ccw(c1319.145,634.005) U7.12@1317.801,632.661 ; U7.11@1316.687,634.088 cw(c1315.343,632.743) 1317.244,632.743 cw(c1319.145,632.743) U7.11@1317.801,634.088 ; U7.12@1316.867,632.482 ccw(c1315.956,633.392) 1317.244,633.392 ccw(c1318.532,633.392) U7.12@1317.621,632.482 ; U7.11@1316.867,634.267 cw(c1315.956,633.357) 1317.244,633.357 cw(c1318.532,633.357) U7.11@1317.621,634.267 ; U7.12@1317.244,632.104 U7.11@1317.244,634.644
  Bottom Layer w0.254: P4.63@1283.879,540.167 v1(1288.909,540.167) ; P4.63@1284.246,540.409 ccw(c1284.829,540.991) 1284.829,540.167 ; P4.63@1284.426,539.87 cw(c1285.144,539.152) 1285.144,540.167 ; P4.63@1284.426,540.588 ccw(c1285.442,541.604) 1285.442,540.167 ; U7.12@1316.332,632.661 ccw(c1314.803,634.189) U7.11@1316.965,634.189 ; U7.11@1316.332,634.088 cw(c1314.803,632.559) U7.12@1316.965,632.559 ; U7.12@1316.511,632.482 ccw(c1315.417,633.576) 1316.965,633.576 ; U7.11@1316.511,634.267 cw(c1315.417,633.173) 1316.965,633.173 ; U7.12@1316.965,631.952 U7.11@1316.965,634.873 ; U7.12@1316.965,632.927 cw(c1318.605,632.927) U7.11@1317.445,634.088 ; 1316.965,633.208 ccw(c1317.992,633.208) U7.12@1317.266,632.482 ; 1316.965,633.541 cw(c1317.992,633.541) U7.11@1317.266,634.267 ; U7.11@1316.965,633.821 ccw(c1318.605,633.821) U7.12@1317.445,632.661
IN_IA: P4.57 R56.2 | length 167.4
  Top Layer w0.254: P4.57@1277.707,539.87 cw(c1276.84,539.003) 1278.067,539.003 cw(c1279.293,539.003) P4.57@1278.426,539.87 ; P4.57@1278.067,540.229 1278.067,538.846 1278.661,538.251 1331.468,538.251 1344.066,550.85 1344.066,612.445 1336.04,620.471 1336.04,625.627 1337.056,626.643 R56.2@1345.997,626.643 ; 1343.948,626.643 ccw(c1343.948,628.997) R56.2@1345.612,627.333 ; 1344.561,626.643 ccw(c1344.561,628.384) R56.2@1345.792,627.153 ; 1345.174,626.643 ccw(c1345.174,627.771) R56.2@1345.971,626.974
IN_IA1: J20_1.2 R16.2 R56.1 R57.1 R57.2 U7.5 U64.6 | length 91.5
  Top Layer w0.254: U7.5@1324.864,632.308 1326.667,632.308 ; U7.5@1325.717,631.911 cw(c1326.296,631.686) 1326.296,632.308 ; U7.5@1325.776,632.661 ccw(c1326.63,633.515) 1326.63,632.308 ; U7.5@1325.954,631.819 cw(c1326.667,631.542) 1326.667,632.308 ; R57.2@1327.527,629.993 cw(c1327.212,629.677) 1327.658,629.677 ; R57.2@1327.527,630.711 ccw(c1327.212,631.026) 1327.658,631.026 ; v1(1327.658,614.832) 1327.658,631.317 ; 1327.658,628.573 cw(c1329.665,628.573) R57.2@1328.246,629.993 ; 1327.658,629.187 cw(c1329.052,629.187) R57.2@1328.066,630.172 ; R57.2@1327.658,630.984 ccw(c1328.06,630.984) R57.2@1327.954,630.597 ; R57.2@1328.021,630.842 cw(c1328.151,631.317) 1327.658,631.317 ; R57.1@1330.325,630.276 1332.205,630.276 J20_1.2@1336.091,634.162 J20_1.2@1335.913,634.162 ; R57.1@1330.606,630.531 ccw(c1331.224,631.149) 1331.224,630.276 ; R57.1@1330.786,629.993 cw(c1331.469,629.309) 1331.469,630.276 ; R57.1@1330.786,630.711 ccw(c1331.837,631.762) 1331.837,630.276 ; J20_1.2@1335.468,634.162 cw(c1333.964,634.162) 1335.027,633.098 cw(c1336.091,632.035) J20_1.2@1336.091,633.539 ; J20_1.2@1335.659,634.492 1342.085,634.492 1342.72,633.857 U64.6@1342.72,631.698 ; J20_1.2@1335.722,634.162 cw(c1334.831,634.162) 1335.461,633.532 cw(c1336.091,632.902) J20_1.2@1336.091,633.793 ; J20_1.2@1336.172,634.08 cw(c1337.166,633.087) 1337.166,634.492 ; J20_1.2@1336.352,633.901 cw(c1337.779,632.474) 1337.779,634.492 ; J20_1.2@1336.531,633.721 cw(c1338.392,631.861) 1338.392,634.492 ; J20_1.2@1336.531,634.602 ccw(c1336.798,634.869) 1336.798,634.492 ; U64.6@1342.361,632.438 ccw(c1341.494,633.305) 1342.72,633.305 ccw(c1343.947,633.305) U64.6@1343.079,632.438 ; U64.6@1342.644,631.622 U64.6@1342.72,631.698 ; U64.6@1342.72,630.809 cw(c1342.72,628.663) 1344.238,630.18 ; U64.6@1342.72,631.063 cw(c1342.72,629.53) 1343.804,630.614 ; U64.6@1342.72,631.317 cw(c1342.72,630.397) 1343.371,631.048 ; U64.6@1343.228,631.317 ccw(c1343.535,631.317) 1343.318,631.1 ; R56.1@1347.898,627.333 ccw(c1347.399,627.832) 1348.105,627.832 ; R56.1@1348.105,626.745 1348.105,628.548 ; 1348.105,627.943 ccw(c1349.21,627.943) R56.1@1348.435,627.155 ; R56.1@1348.384,626.974 1351.991,626.974 1352.321,627.304 R16.2@1352.321,633.12 ; R56.1@1348.613,627.336 cw(c1349.805,628.548) 1348.105,628.548 ; R56.1@1348.871,626.614 cw(c1349.738,625.747) 1349.738,626.974 cw(c1349.738,628.2) R56.1@1348.871,627.333 ; R16.2@1351.962,632.634 cw(c1351.095,631.767) 1352.321,631.767 cw(c1353.548,631.767) R16.2@1352.681,632.634 ; 1326.667,632.308 1327.658,631.317 ; U64.6@1342.72,631.698 1344.854,629.564 1347.089,629.564 1348.105,628.548
  Bottom Layer w0.254: v1@1327.656,614.832 ccw(c1327.844,614.842) v1@1327.718,614.702 ; v1(1327.658,614.832) 1327.658,614.756 1329.182,613.385 v1(1329.182,610.362)
  other v1: 1329.182,610.895
IN_IB: P4.59 P4.61 R13.2 | length 128.4
  Top Layer w0.254: P4.59@1280.41,540.229 P4.61@1282.067,540.229 1283.206,539.09 1285.875,539.09 1289.761,542.976 1326.744,542.976 1329.207,545.44 1329.207,601.65 1326.82,604.037 R13.2@1326.82,607.543 ; P4.59@1280.426,539.87 cw(c1281.293,539.003) 1281.293,540.229 cw(c1281.293,541.455) P4.59@1280.426,540.588 ; P4.61@1281.707,539.87 ccw(c1280.84,539.003) 1280.84,540.229 ccw(c1280.84,541.455) P4.61@1281.707,540.588 ; P4.61@1282.067,539.721 cw(c1282.067,538.495) 1282.934,539.362 cw(c1283.801,540.229) P4.61@1282.575,540.229 ; R13.2@1326.511,607.564 cw(c1325.767,606.82) 1326.82,606.82 ; R13.2@1326.511,608.283 ccw(c1325.583,609.211) 1326.896,609.211 ; R13.2@1326.691,608.103 ccw(c1326.196,608.598) 1326.896,608.598 ; 1326.82,606.575 cw(c1328.22,606.575) R13.2@1327.23,607.564 ; 1326.82,607.188 cw(c1327.606,607.188) R13.2@1327.05,607.744 ; R13.2@1326.896,608.355 1326.896,610.87 ; R13.2@1326.896,608.557 1326.947,608.607 ; 1326.896,609.089 ccw(c1328.036,609.089) R13.2@1327.23,608.283
IN_UB: P4.51
IN_UC: P4.53
IN_UD: P4.55
JTCK: JTAG.9 MCU.109 R5.2 | length 42.9
  Top Layer w0.254: R5.2@1169.973,593.6 cw(c1170.766,592.807) R5.2@1170.766,593.928 ; R5.2@1170.026,593.547 1170.407,593.928 JTAG.9@1175.106,593.928 ; R5.2@1170.153,593.42 cw(c1171.379,592.194) 1171.379,593.928 ; R5.2@1170.332,593.241 cw(c1171.992,591.581) 1171.992,593.928 ; R5.2@1170.512,593.061 cw(c1172.605,590.967) 1172.605,593.928 ; JTAG.9@1174.628,593.488 ccw(c1173.564,592.424) 1173.564,593.928 ccw(c1173.564,595.432) JTAG.9@1174.628,594.369 ; JTAG.9@1174.807,593.667 ccw(c1174.177,593.037) 1174.177,593.928 ccw(c1174.177,594.819) JTAG.9@1174.807,594.189 ; v1(1181.659,595.427) 1181.659,599.008 1186.18,603.529 v1@1190.117,603.529 ; v1(1190.066,604.672) MCU.109@1191.692,604.672
  Bottom Layer w0.254: JTAG.9@1175.106,593.928 1175.309,593.928 1176.579,595.198 1181.333,595.198 ; JTAG.9@1175.143,594.297 ccw(c1175.143,595.588) 1176.056,594.675 ; JTAG.9@1175.143,594.551 ccw(c1175.143,596.456) 1176.49,595.109 ; JTAG.9@1175.766,593.928 cw(c1176.87,593.928) 1176.089,594.709 ; 1181.125,595.198 1181.446,595.205 v1(1181.659,595.427) ; v1(1190.066,603.529) v1(1190.066,604.672)
JTDI: JTAG.5 MCU.110 R4.2 | length 36.7
  Top Layer w0.2: v1(1181.811,600.278) 1185.697,604.164 MCU.110@1191.971,604.164
  Top Layer w0.254: R4.2@1170.026,599.262 1174.852,599.262 JTAG.5@1175.106,599.008 ; R4.2@1170.512,598.903 cw(c1171.379,598.036) 1171.379,599.262 cw(c1171.379,600.489) R4.2@1170.512,599.621 ; 1172.951,599.262 cw(c1172.951,596.891) JTAG.5@1174.628,598.568 ; 1173.564,599.262 cw(c1173.564,597.504) JTAG.5@1174.807,598.747 ; JTAG.5@1174.628,599.449 cw(c1174.177,599.899) 1174.177,599.262 cw(c1174.177,598.117) JTAG.5@1174.987,598.927
  Bottom Layer w0.254: JTAG.5@1175.106,599.008 1175.817,599.008 1177.087,600.278 ; JTAG.5@1175.127,598.87 ccw(c1175.246,599.892) 1175.973,599.164 ; JTAG.5@1175.156,599.122 ccw(c1175.323,600.557) 1176.344,599.536 ; JTAG.5@1175.186,599.375 ccw(c1175.401,601.222) 1176.716,599.907 ; JTAG.5@1175.215,599.627 ccw(c1175.478,601.887) 1177.087,600.278 ; v1(1181.811,600.278) 1177.087,600.278
JTDO: JTAG.13 MCU.133 R7.2 | length 32.7
  Top Layer w0.254: R7.2@1170.026,588.848 JTAG.13@1175.106,588.848 ; R7.2@1170.512,588.489 cw(c1171.379,587.622) 1171.379,588.848 cw(c1171.379,590.075) R7.2@1170.512,589.207 ; JTAG.13@1174.628,588.408 ccw(c1173.564,587.344) 1173.564,588.848 ccw(c1173.564,590.352) JTAG.13@1174.628,589.289 ; JTAG.13@1174.807,588.587 ccw(c1174.177,587.957) 1174.177,588.848 ccw(c1174.177,589.739) JTAG.13@1174.807,589.109 ; v1(1178.56,590.067) 1180.338,590.067 1181.71,591.439 v1(1190.752,591.439) ; v1(1190.752,592.684) MCU.133@1191.717,592.684
  Bottom Layer w0.254: JTAG.13@1175.106,588.848 1175.106,589.026 1176.147,590.067 ; JTAG.13@1175.143,589.471 ccw(c1175.143,590.456) 1175.839,589.76 ; JTAG.13@1175.509,588.896 cw(c1176.464,589.022) 1175.783,589.703 ; JTAG.13@1175.761,588.929 cw(c1177.108,589.107) 1176.147,590.067 ; v1(1178.56,590.067) 1176.147,590.067 ; v1(1190.752,591.439) v1(1190.752,592.684)
JTMS: JTAG.7 MCU.105 R6.2 | length 49.3
  Top Layer w0.254: R6.2@1170.026,596.214 1174.852,596.214 JTAG.7@1175.106,596.468 ; R6.2@1170.127,595.935 1170.127,596.113 R6.2@1170.305,595.935 ; R6.2@1170.512,595.855 cw(c1171.379,594.988) 1171.379,596.214 cw(c1171.379,597.441) R6.2@1170.512,596.573 ; 1172.951,596.214 ccw(c1172.951,598.585) JTAG.7@1174.628,596.909 ; 1173.564,596.214 ccw(c1173.564,597.972) JTAG.7@1174.807,596.729 ; v1(1173.886,605.206) 1174.344,605.663 1196.085,605.663 1196.315,605.893 MCU.105@1196.315,606.831 ; JTAG.7@1174.628,596.028 ccw(c1174.177,595.577) 1174.177,596.214 ccw(c1174.177,597.359) JTAG.7@1174.987,596.55
  Bottom Layer w0.254: 1173.455,596.443 1173.455,596.494 1173.632,596.316 ; 1173.48,596.519 1173.48,604.799 v1(1173.886,605.206) ; 1173.932,596.316 cw(c1173.932,595.332) JTAG.7@1174.628,596.028 ; 1174.103,596.316 ccw(c1174.103,597.101) JTAG.7@1174.76,596.671 ; JTAG.7@1174.547,596.81 cw(c1173.632,597.41) 1173.632,596.316 ; JTAG.7@1174.953,596.316 1173.632,596.316 ; JTAG.7@1175.106,596.087 JTAG.7@1175.106,596.468
JTRST: JTAG.3 MCU.134 R3.2 | length 46.1
  Top Layer w0.254: R3.2@1170.026,602.31 1170.407,602.31 1170.915,601.802 1174.852,601.802 JTAG.3@1175.106,601.548 ; R3.2@1170.153,602.31 ccw(c1171.379,603.537) 1171.379,601.802 ; R3.2@1170.24,602.072 cw(c1170.41,601.606) R3.2@1170.76,601.957 ; R3.2@1170.332,602.49 ccw(c1171.992,604.15) 1171.992,601.802 ; R3.2@1170.512,602.669 ccw(c1172.605,604.763) 1172.605,601.802 ; R3.2@1170.661,602.31 ccw(c1171.274,602.31) 1170.84,601.877 ; 1172.951,601.802 cw(c1172.951,599.431) JTAG.3@1174.628,601.108 ; 1173.564,601.802 cw(c1173.564,600.044) JTAG.3@1174.807,601.287 ; JTAG.3@1174.628,601.989 cw(c1174.177,602.439) 1174.177,601.802 cw(c1174.177,600.657) JTAG.3@1174.987,601.467 ; JTAG.3@1175.143,601.917 ccw(c1175.143,602.779) 1175.752,602.17 ; JTAG.3@1175.143,602.171 ccw(c1175.143,603.646) 1176.186,602.603 ; JTAG.3@1175.385,602.082 1175.664,602.082 1176.426,602.844 1179.601,602.844 1181.1,601.345 1181.1,592.734 1181.661,592.174 1191.285,592.174 ; JTAG.3@1175.512,601.548 cw(c1176.432,601.548) 1175.781,602.199 ; JTAG.3@1175.766,601.548 cw(c1177.299,601.548) 1176.215,602.632
LCS: P15.4 | length 5.7
  Top Layer w0.2: 1302.715,599.186 1303.706,599.973 1303.706,600.989 P15.4@1303.934,601.218
  Bottom Layer w0.254: v1(1303.934,605.638) 1303.934,608.762
MOSI: D3.2 Designator4.mo MCU.43 R50.2 | length 116
  Top Layer w0.2: v1(1187.145,573.583) 1187.094,580.517 1191.336,584.759 v1(1191.336,584.81) ; v1@1191.258,584.68 ccw(c1191.128,584.81) v1@1191.311,584.81 ; v1(1213.307,590.855) 1213.988,590.174 MCU.43@1214.765,590.174 ; MCU.43@1215.263,590.22 1216.019,590.22 1216.298,589.94 v1(1216.685,589.94) ; v1(1229.436,589.763) 1229.716,590.042 R50.2@1230.681,590.042
  Top Layer w0.254: v1(1198.423,590.779) v1@1211.732,590.779 ; D3.2@1229.8,595.759 cw(c1228.822,594.781) 1230.205,594.781 cw(c1231.588,594.781) D3.2@1230.61,595.759 ; D3.2@1229.979,595.939 cw(c1229.435,595.394) 1230.205,595.394 cw(c1230.975,595.394) D3.2@1230.431,595.939 ; 1230.205,591.388 ccw(c1231.569,591.388) R50.2@1230.605,590.423 ; 1230.205,592.001 ccw(c1232.183,592.001) R50.2@1230.784,590.603 ; 1230.205,592.614 ccw(c1232.796,592.614) R50.2@1230.964,590.782 ; D3.2@1230.205,596.214 1230.205,590.467 R50.2@1230.401,590.271
  Bottom Layer w0.2: v1(1187.145,573.583) 1189.507,573.583 1190.142,572.948 1190.142,560.705 1205.814,545.033 1205.814,541.757 ; v1(1191.336,584.81) 1196.607,590.08 ; 1196.645,590.093 1197.331,590.779 v1(1198.423,590.779) ; Designator4.mo@1204.443,540.385 1205.814,541.757 ; Designator4.mo@1204.646,540.92 ccw(c1204.646,541.721) 1205.212,541.155 ; Designator4.mo@1204.906,540.284 cw(c1205.985,540.394) 1205.219,541.161 ; Designator4.mo@1205.105,540.305 cw(c1206.526,540.449) 1205.516,541.459 ; Designator4.mo@1205.304,540.325 cw(c1207.067,540.504) 1205.814,541.757 ; v1(1211.809,590.855) v1(1213.307,590.855) ; v1(1216.685,589.94) 1229.258,589.94
NetC1_2: C1.2 MCU.8 Y1.2 | length 9
  Top Layer w0.254: Y1.2@1194.225,576.449 cw(c1192.61,574.835) 1194.894,574.835 ; Y1.2@1194.405,576.629 cw(c1193.223,575.448) 1194.894,575.448 ; Y1.2@1194.584,576.809 cw(c1193.837,576.061) 1194.894,576.061 ; C1.2@1194.714,572.607 ccw(c1194.281,573.04) 1194.894,573.04 ccw(c1195.507,573.04) C1.2@1195.073,572.607 ; C1.2@1194.894,572.427 Y1.2@1194.894,576.499
NetC2_2: C2.2 MCU.9 Y1.1 | length 13
  Top Layer w0.254: Y1.1@1199.105,576.449 cw(c1198.234,575.578) 1199.466,575.578 ; C2.2@1199.286,572.607 ccw(c1198.853,573.04) 1199.466,573.04 ccw(c1200.079,573.04) C2.2@1199.645,572.607 ; C2.2@1199.466,572.427 1199.466,576.531 Y1.1@1199.667,576.732 ; 1199.466,575.586 cw(c1200.687,575.586) Y1.1@1199.823,576.449
  Bottom Layer w0.2: Y1.1@1199.464,576.809 1200.125,577.469 1204.873,577.469
NetC13_1: C13.1 C14.1 R12.2 U9.18 | length 30
  Top Layer w0.254: U9.18@1190.379,643.755 ccw(c1189.295,644.839) 1190.828,644.839 ccw(c1192.361,644.839) U9.18@1191.277,643.755 ; U9.18@1190.559,643.575 ccw(c1189.908,644.226) 1190.828,644.226 ccw(c1191.748,644.226) U9.18@1191.098,643.575 ; U9.18@1190.955,643.179 U9.18@1190.828,643.052 1190.828,646.074 1191.438,646.684 C13.1@1197.559,646.684 C14.1@1197.559,649.402 1197.534,649.376 R12.2@1194.46,649.376 ; R12.2@1194.947,649.017 cw(c1195.814,648.15) 1195.814,649.376 cw(c1195.814,650.603) R12.2@1194.947,649.736 ; 1196.144,649.376 ccw(c1196.144,650.69) C14.1@1197.073,649.761 ; 1196.267,649.376 cw(c1196.267,648.237) C14.1@1197.073,649.043 ; 1196.758,649.376 ccw(c1196.758,650.076) C14.1@1197.253,649.581 ; C13.1@1197.073,646.325 ccw(c1196.206,645.458) 1196.206,646.684 ccw(c1196.206,647.91) C13.1@1197.073,647.043 ; C13.1@1197.2,647.043 ccw(c1196.333,647.91) 1197.559,647.91 ccw(c1198.786,647.91) C13.1@1197.918,647.043 ; C14.1@1197.2,649.043 cw(c1196.333,648.175) 1197.559,648.175 cw(c1198.786,648.175) C14.1@1197.918,649.043
NetC15_1: C15.1 C16.1 R23.2 R25.1 U9.19 U13.2 | length 49.2
  Top Layer w0.254: R23.2@1168.171,647.37 R25.1@1171.042,647.37 ; R23.2@1168.326,647.6 ccw(c1168.882,648.156) 1168.882,647.37 ; R23.2@1168.505,647.061 cw(c1169.25,646.317) 1169.25,647.37 ; R23.2@1168.505,647.78 ccw(c1169.495,648.77) 1169.495,647.37 ; 1169.855,647.37 cw(c1169.855,646.057) R25.1@1170.784,646.985 ; 1169.978,647.37 ccw(c1169.978,648.51) R25.1@1170.784,647.704 ; 1170.469,647.37 cw(c1170.469,646.67) R25.1@1170.964,647.165 ; R25.1@1171.143,647.471 1172.159,648.487 ; R25.1@1171.156,647.852 ccw(c1171.195,648.642) R25.1@1171.754,648.083 ; R25.1@1171.169,648.106 ccw(c1171.234,649.412) 1172.159,648.487 ; R25.1@1171.651,647.598 cw(c1172.571,647.598) 1171.921,648.249 ; 1177.298,648.546 cw(c1178.382,647.462) C16.1@1178.382,648.995 ; 1177.605,648.853 ccw(c1176.954,649.503) C16.1@1177.874,649.503 ; 1177.732,648.98 cw(c1178.382,648.33) C16.1@1178.382,649.249 ; C16.1@1178.741,649.271 cw(c1179.609,648.404) 1179.609,649.63 cw(c1179.609,650.857) C16.1@1178.741,649.99 ; C15.1@1181.579,649.271 ccw(c1180.712,648.404) 1180.712,649.63 ccw(c1180.712,650.857) C15.1@1181.579,649.99 ; C15.1@1182.297,649.271 cw(c1183.165,648.404) 1183.165,649.63 cw(c1183.165,650.857) C15.1@1182.297,649.99 ; U13.2@1187.059,648.351 ccw(c1186.422,647.714) 1186.422,648.614 ccw(c1186.422,649.515) U13.2@1187.059,648.878 ; U9.19@1187.839,643.755 ccw(c1186.755,644.839) 1188.288,644.839 ccw(c1189.821,644.839) U9.19@1188.737,643.755 ; U13.2@1187.959,648.351 cw(c1187.164,647.555) 1188.288,647.555 ; U9.19@1188.019,643.575 ccw(c1187.368,644.226) 1188.288,644.226 ccw(c1189.208,644.226) U9.19@1188.558,643.575 ; U9.19@1188.288,643.052 1188.288,648.099 U13.2@1187.773,648.614 1184.326,648.614 1183.31,649.63 C15.1@1181.938,649.63 C16.1@1178.382,649.63 1177.239,648.487 1172.159,648.487 ; 1188.288,647.872 cw(c1188.965,647.872) U13.2@1188.486,648.351
NetC45_1: 
NetC45_2: 
NetC46_2: 
NetC47_1: 
NetC47_2: 
NetC48_2: 
NetCT2_1: CT2.1 D8.1 D9.2 R16.1 U64.2 | length 46.4
  Top Layer w0.254: U64.2@1344.901,640.058 ccw(c1344.034,640.925) 1345.26,640.925 ccw(c1346.487,640.925) U64.2@1345.619,640.058 ; U64.2@1345.26,639.318 1345.26,642.239 1345.514,642.493 1352.118,642.493 1352.423,642.188 ; R16.1@1351.962,635.893 ccw(c1350.85,637.005) 1352.423,637.005 ; R16.1@1352.142,635.713 ccw(c1351.463,636.392) 1352.423,636.392 ; R16.1@1352.321,635.406 1352.423,635.508 1352.423,642.188 ; 1352.423,636.515 ccw(c1353.303,636.515) R16.1@1352.681,635.893 ; D9.2@1364.285,647.7 1364.285,646.938 1359.535,642.188 1352.423,642.188 ; D9.2@1364.384,647.471 1364.854,647.941 D8.1@1364.854,651.698 ; D8.1@1364.691,651.535 CT2.1@1368.704,655.549
NetCT2_3: CT2.3
NetCT3_2: CT3.2 R13.1 | length 31.6
  Top Layer w0.254: R13.1@1329.411,607.924 cw(c1330.024,607.31) 1330.024,608.178 cw(c1330.024,608.537) R13.1@1329.77,608.283 ; R13.1@1329.588,608.178 CT3.2@1338.612,608.178 ; R13.1@1329.59,607.744 cw(c1330.637,606.697) 1330.637,608.178 ; R13.1@1329.77,607.564 cw(c1331.25,606.084) 1331.25,608.178 ; 1334.63,608.178 cw(c1334.63,604.107) CT3.2@1337.509,606.985 ; 1334.846,608.178 ccw(c1334.846,611.944) CT3.2@1337.509,609.281 ; 1335.243,608.178 cw(c1335.243,604.72) CT3.2@1337.688,607.165 ; 1335.459,608.178 ccw(c1335.459,611.33) CT3.2@1337.688,609.101 ; 1335.857,608.178 cw(c1335.857,605.333) CT3.2@1337.868,607.345 ; 1336.072,608.178 ccw(c1336.072,610.717) CT3.2@1337.868,608.921 ; 1336.47,608.178 cw(c1336.47,605.947) CT3.2@1338.047,607.524 ; 1336.685,608.178 ccw(c1336.685,610.104) CT3.2@1338.047,608.742
NetCT3_3: CT3.3 J20_2.1 | length 49.2
  Top Layer w0.254: CT3.3@1359.909,591.364 cw(c1356.211,587.667) 1361.44,587.667 ; CT3.3@1360.088,591.544 cw(c1356.825,588.28) 1361.44,588.28 ; CT3.3@1360.268,591.724 cw(c1357.438,588.894) 1361.44,588.894 ; CT3.3@1360.447,591.903 cw(c1358.051,589.507) 1361.44,589.507 ; CT3.3@1360.627,592.083 cw(c1358.664,590.12) 1361.44,590.12 ; CT3.3@1360.807,592.262 cw(c1359.277,590.733) 1361.44,590.733 ; CT3.3@1361.186,592.277 1361.44,592.023 1361.44,566.445 1362.227,565.658 ; 1361.44,589.52 cw(c1364.048,589.52) CT3.3@1362.204,591.364 ; 1361.44,590.134 cw(c1363.435,590.134) CT3.3@1362.024,591.544 ; 1361.44,590.747 cw(c1362.821,590.747) CT3.3@1361.845,591.724
NetCT3_4: CT3.4 | length 69
  Top Layer w0.254: 1356.437,606.222 ccw(c1356.437,611.131) CT3.4@1359.909,607.66 ; 1357.051,606.222 ccw(c1357.051,610.518) CT3.4@1360.088,607.48 ; 1357.227,565.658 1355.573,565.658 1354.379,566.852 1354.379,604.85 1355.75,606.222 CT3.4@1361.542,606.222 ; 1357.664,606.222 ccw(c1357.664,609.904) CT3.4@1360.268,607.3 ; 1357.839,606.222 cw(c1357.839,603.294) CT3.4@1359.909,605.364 ; 1358.277,606.222 ccw(c1358.277,609.291) CT3.4@1360.447,607.121 ; 1358.452,606.222 cw(c1358.452,603.908) CT3.4@1360.088,605.544 ; 1358.89,606.222 ccw(c1358.89,608.678) CT3.4@1360.627,606.941 ; 1359.065,606.222 cw(c1359.065,604.521) CT3.4@1360.268,605.724
NetP232_1: 
NetP232_2: 
NetR15_5: R15.5 U11.9 | length 6.3
  Top Layer w0.254: R15.5@1291.234,581.279 1291.882,581.927 U11.9@1291.882,585.927 ; R15.5@1291.234,581.652 ccw(c1291.234,582.552) 1291.871,581.916 ; U11.9@1291.747,585.13 cw(c1291.42,584.803) 1291.882,584.803 ; 1291.882,584.866 cw(c1292.256,584.866) U11.9@1291.992,585.13
NetR15_6: R15.6 U11.8 | length 5.8
  Top Layer w0.254: R15.6@1290.347,581.616 ccw(c1290.137,581.826) 1290.434,581.826 ccw(c1290.731,581.826) R15.6@1290.521,581.616 ; R15.6@1290.434,581.279 1290.434,581.982 1290.612,582.16 U11.8@1290.612,585.927 ; U11.8@1290.477,585.13 cw(c1290.15,584.803) 1290.612,584.803 ; 1290.612,584.866 cw(c1290.986,584.866) U11.8@1290.722,585.13
NetR15_7: R15.7 U11.7 | length 6.5
  Top Layer w0.254: U11.7@1289.207,585.13 cw(c1288.942,584.864) 1289.317,584.864 ; 1289.317,584.804 cw(c1289.777,584.804) U11.7@1289.452,585.13 ; U11.7@1289.317,586.154 1289.317,582.16 1289.634,581.843 R15.7@1289.634,581.279 ; R15.7@1289.547,581.616 ccw(c1289.337,581.826) 1289.634,581.826 ccw(c1289.931,581.826) R15.7@1289.721,581.616 ; 1289.636,581.841 cw(c1289.325,581.529) R15.7@1289.765,581.529
NetR15_8: R15.8 U11.6 | length 5.9
  Top Layer w0.254: 1287.996,584.682 cw(c1288.63,584.682) U11.6@1288.182,585.13 ; U11.6@1287.996,585.648 1287.996,582.117 R15.8@1288.834,581.279 ; 1288.198,581.916 ccw(c1288.834,582.552) R15.8@1288.834,581.652
NetR17_1: R17.1 U22.1 U22.24 | length 111
  Top Layer w0.2: v1(1216.711,566.064) 1217.219,566.115 v1(1231.57,566.09)
  Top Layer w0.254: v1(1234.135,575.691) 1265.58,575.691 1268.349,572.922 1293.292,572.922 1296.492,569.722 R17.1@1300.785,569.722 ; 1298.901,569.722 ccw(c1298.901,571.555) R17.1@1300.197,570.259 ; 1299.514,569.722 ccw(c1299.514,570.942) R17.1@1300.377,570.079 ; 1299.759,569.722 cw(c1299.759,569.103) R17.1@1300.197,569.541
  Bottom Layer w0.254: U22.24@1216.762,567.182 1216.762,570.89 1218.057,572.186 1232.154,572.186 1234.237,574.269 v1@1234.237,575.64 ; 1216.762,567.404 ccw(c1216.996,567.404) U22.24@1216.83,567.238
NetR18_1: R18.1 U22.25 U22.48 | length 26.9
  Bottom Layer w0.254: v1(1214.501,566.75) 1214.501,572.922 1216.025,574.446 1216.736,574.446 U22.25@1216.736,575.158 ; 1216.736,574.468 cw(c1217.058,574.468) U22.25@1216.83,574.695 ; U22.25@1216.838,574.904 1216.838,574.04 1217.32,573.557 1230.808,573.557 1231.443,574.192 U22.48@1231.443,575.158
NetR24_5: R24.5 U11.5 | length 5.6
  Top Layer w0.254: R24.5@1285.966,581.692 ccw(c1285.756,581.902) 1286.053,581.902 ccw(c1286.35,581.902) R24.5@1286.14,581.692 ; R24.5@1286.053,581.355 1286.053,583.87 1286.904,584.721 U11.5@1286.904,585.673 ; U11.5@1286.692,585.109 cw(c1286.42,584.709) 1286.904,584.709
NetR24_6: R24.6 U11.4 | length 6.9
  Top Layer w0.254: R24.6@1285.166,581.692 ccw(c1284.956,581.902) 1285.253,581.902 ccw(c1285.55,581.902) R24.6@1285.34,581.692 ; R24.6@1285.253,581.355 1285.253,585.622 U11.4@1285.583,585.953 ; 1285.253,584.191 cw(c1286.581,584.191) U11.4@1285.642,585.13 ; 1285.253,584.804 cw(c1285.967,584.804) U11.4@1285.462,585.309 ; U11.4@1285.253,585.417 cw(c1285.354,585.417) U11.4@1285.282,585.489